# Altium PCB 密码球锁202061.PcbDoc (part 2 of 2)
Units mm, origin at the board's own origin, x right, y up, seen from the top; angles counter-clockwise.
Board outline 49.08 x 48.4 mm, 2 copper layers (Top, Bottom), stack 0.323 mm thick; 66 components, 39 nets, 195 pads, 129 vias.
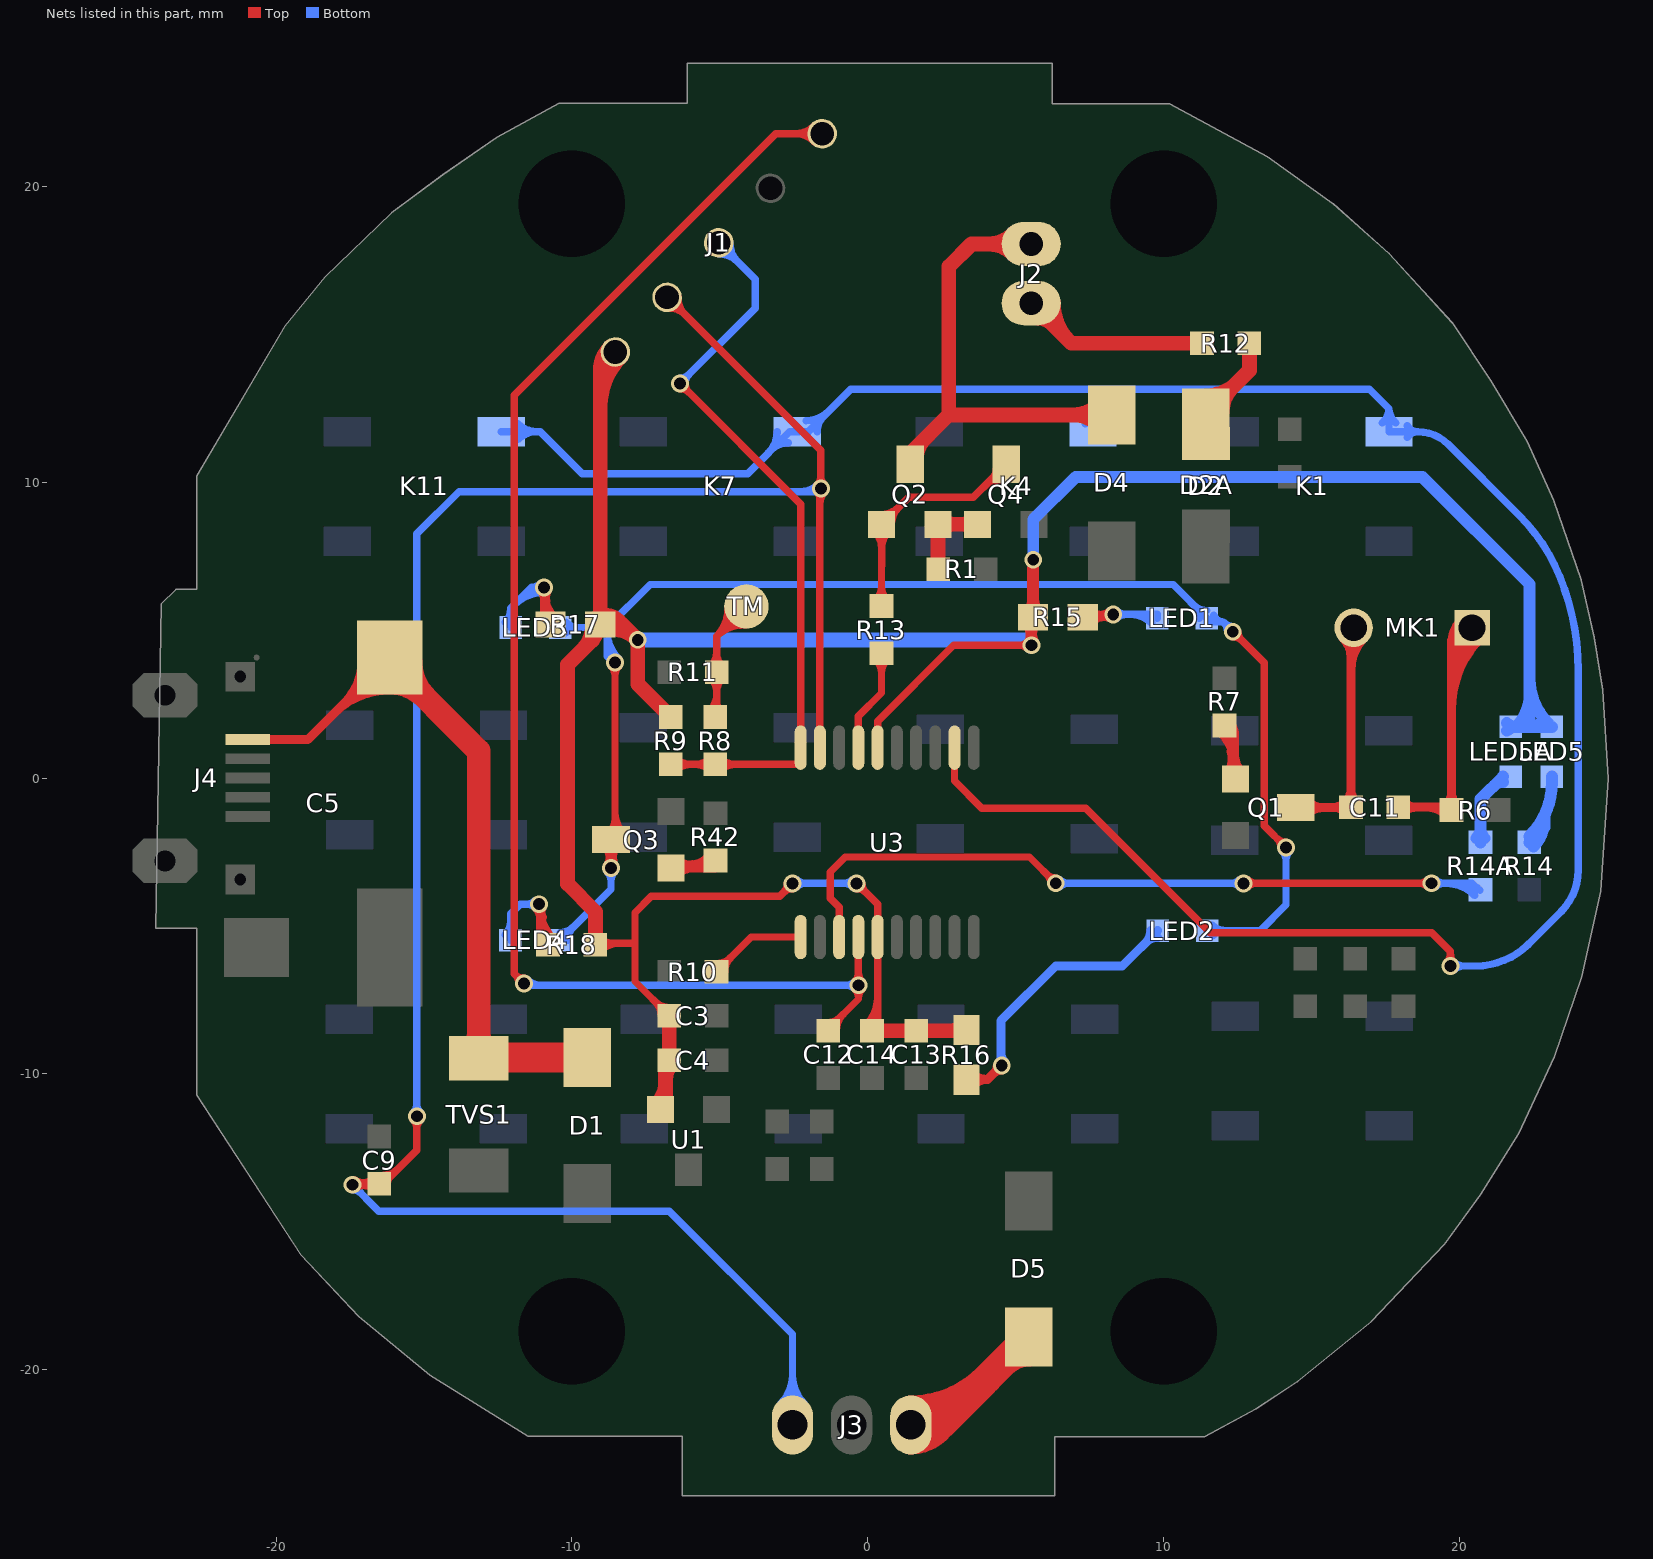
[diagram p2: the nets of this part, all layers, seen from the top]

## Via types
v1: diameter 0.6/0.6 (per signal layer), hole 0.4, Top to Bottom, 122 vias
v2: diameter 0.6, hole 0.4, Top to Bottom, tented both sides, 4 vias
v3: diameter 0.61, hole 0.406, Top to Bottom, tented both sides, 3 vias

## Nets (pads, with @x,y where several pads share a name; then routed paths per layer and width w, separated by ;. In a path a pad name is that pad's centre, name@x,y a point inside that pad or via, vN(x,y) a via of type N, cw(c..) or ccw(c..) an arc to the next point about the centre after c; other vN are vias at no path point) (continued)
KEYY_3: K1.1 K4.1 K7.1 K11.1 U3.12 | length 90.3
  Top w0.25: U3.12@2.929,1.027 2.929,-0.098 3.847,-1.016 7.366,-1.016 11.572,-5.222 19.05,-5.222 19.685,-5.857 v1(19.685,-6.35) ; v1@19.561,-6.226 ccw(c19.263,-5.928) 19.685,-5.928 ccw(c20.107,-5.928) v1@19.809,-6.226
  Bottom w0.25: K11.1@-12.39,11.704 -11.069,11.704 -9.652,10.287 -4.064,10.287 -2.647,11.704 K7.1@-2.39,11.704 -2.012,11.704 -0.577,13.139 7.663,13.139 ; K11.1@-11.825,11.439 cw(c-11.185,10.798) -11.185,11.704 cw(c-11.185,12.609) K11.1@-11.825,11.969 ; -3.361,10.99 ccw(c-4.075,11.704) K7.1@-3.065,11.704 ; -3.257,11.094 cw(c-2.69,10.528) K7.1@-2.69,11.329 ; K7.1@-2.09,12.079 ccw(c-2.09,13.173) -1.317,12.399 ; K7.1@-1.715,11.704 cw(c-0.999,11.704) -1.506,12.21 ; K4.1@7.344,11.969 ccw(c6.576,12.737) 7.663,12.737 ; 7.663,12.481 ccw(c8.387,12.481) K4.1@7.875,11.969 ; K4.1@7.884,11.827 K4.1@7.61,11.704 7.663,11.704 7.663,13.139 ; K1.1@17.376,11.997 ccw(c16.991,12.481) 17.61,12.481 ; K1.1@17.843,11.997 cw(c18.228,12.481) 17.61,12.481 ; K1.1@18.229,11.507 cw(c18.581,11.291) 18.581,11.704 ; K1.1@18.229,11.9 ccw(c18.581,12.117) 18.581,11.704 ; v1(19.685,-6.35) 20.538,-6.35 ; v1@19.809,-6.474 cw(c20.107,-6.772) 20.107,-6.35 cw(c20.107,-5.928) v1@19.809,-6.226 ; 7.663,13.139 16.952,13.139 17.61,12.481 ; 17.61,12.481 K1.1@17.61,11.704 18.581,11.704 ; 18.581,11.704 cw(c18.581,10.247) 19.61,11.277 22.001,8.887 cw(c17.551,4.437) 23.365,6.845 cw(c15.623,3.638) 24.003,3.638 24.003,-3.113 cw(c22.014,-3.113) 23.421,-4.519 22.334,-5.606 ; 20.538,-6.35 ccw(c20.538,-3.81) 22.334,-5.606 ; 20.538,-6.35 ccw(c20.538,-3.81) 22.334,-5.606
M3V3: C3.1 C4.1 C13.2 C14.2 J1.1 LED5.1 LED5A.1 R9.2 R15.1 R16.1 R17.1 R18.2 U1.2 U3.5 U3.16 | length 128.7
  Top w0.25: R18.2@-9.208,-5.638 -9.208,-5.577 -7.868,-5.577 ; R18.2@-9.014,-5.832 cw(c-8.396,-6.449) -8.396,-5.577 ; R18.2@-9.014,-5.443 ccw(c-8.692,-5.122) -8.692,-5.577 ; C3.1@-6.985,-8.032 ccw(c-7.649,-8.032) -7.179,-7.563 ccw(c-6.71,-7.093) C3.1@-6.71,-7.757 ; C3.1@-6.71,-8.032 -7.868,-6.874 -7.868,-5.577 ; v3@-2.72,-3.556 cw(c-3.154,-3.556) -2.847,-3.863 cw(c-2.54,-4.17) v3@-2.54,-3.736 ; v3(-2.54,-3.556) -2.979,-3.995 -7.314,-3.995 -7.868,-4.549 -7.868,-5.577 ; v3@-0.381,-3.736 cw(c-0.381,-4.17) -0.074,-3.863 cw(c0.233,-3.556) v3@-0.201,-3.556 ; v3(-0.381,-3.556) 0.329,-4.266 U3.5@0.329,-5.373 0.329,-8.537 C14.2@0.138,-8.537 ; C14.2@-0.056,-8.342 ccw(c-0.985,-7.413) 0.329,-7.413 ; C14.2@0.121,-8.519 ccw(c-0.382,-8.017) 0.329,-8.017 ; U3.16@0.329,1.027 0.329,1.924 2.894,4.489 v1(5.533,4.489) 5.533,5.437 R15.1@5.585,5.437 ; R15.1@5.296,5.211 cw(c4.724,4.639) v1@5.533,4.639 ; v1@5.384,4.581 ccw(c4.951,4.847) 5.442,4.979 ; v1@5.409,4.365 ccw(c5.111,4.067) 5.111,4.489 ccw(c5.111,4.912) 5.409,4.613 ccw(c5.111,4.912) 5.533,4.912 ccw(c5.956,4.912) v1@5.657,4.613 ; 5.485,4.817 ccw(c5.766,4.892) v1@5.621,4.641 ; v1@5.533,4.693 cw(c6.266,4.693) R15.1@5.748,5.211 ; 5.608,4.971 ccw(c6.047,4.853) v1@5.676,4.59
  Top w0.4: R15.1@5.413,5.61 ccw(c4.995,6.028) 5.585,6.028 ccw(c6.176,6.028) R15.1@5.758,5.61 ; R15.1@5.585,5.437 5.585,6.941 v1(5.59,7.377)
  Top w0.5: -9.659,4.325 ccw(c-10.523,5.188) R17.1@-9.301,5.188 ; -9.301,4.646 cw(c-8.924,4.646) R17.1@-9.045,5.004 ; R17.1@-9.267,5.077 cw(c-9.52,4.9) -9.301,4.682 ; R18.2@-9.208,-5.638 -9.208,-4.516 -10.146,-3.578 -10.146,3.837 -9.301,4.682 ; R17.1@-9.181,5.326 ccw(c-9.513,5.658) -9.043,5.658 ccw(c-8.574,5.658) R17.1@-8.906,5.326 ; R17.1@-9.05,5.485 cw(c-8.893,4.82) -8.41,5.303 ; -9.043,12.56 cw(c-6.695,12.56) J1.1@-8.356,14.221 ; -9.043,13.767 cw(c-7.902,13.767) J1.1@-8.709,14.574 ; R17.1@-8.935,4.999 cw(c-8.651,3.795) v1(-7.776,4.67) ; R17.1@-8.842,5.05 cw(c-8.51,4.718) -8.51,5.188 cw(c-8.51,5.658) R17.1@-8.842,5.326 ; J1.1@-8.782,14.398 cw(c-9.386,14.398) -8.959,13.971 cw(c-8.532,13.544) J1.1@-8.532,14.148 ; J1.1@-8.532,14.398 -9.043,13.887 R17.1@-9.043,5.188 ; U1.2@-7.156,-11.06 ccw(c-7.93,-10.287) -6.836,-10.287 ; U1.2@-7.01,-11.206 -6.836,-11.206 -6.836,-9.534 C4.1@-6.71,-9.534 C3.1@-6.71,-8.032 ; -6.836,-10.2 cw(c-6.044,-10.2) C4.1@-6.604,-9.64 ; R9.2@-6.659,2.063 -7.776,3.179 v1(-7.776,4.67) ; C14.2@0.138,-8.537 3.33,-8.537 R16.1@3.33,-8.519 ; 2.819,-8.537 ccw(c2.819,-8.008) R16.1@3.193,-8.382 ; -9.301,4.682 R17.1@-9.301,5.188 ; R17.1@-9.301,5.188 R17.1@-9.043,5.188 ; R17.1@-9.043,5.188 -8.294,5.188 v1(-7.776,4.67)
  Bottom w0.25: v3(-2.54,-3.556) v3(-0.381,-3.556) ; v3@-2.413,-3.683 cw(c-2.106,-3.99) -2.106,-3.556 cw(c-2.106,-3.122) v3@-2.413,-3.429 ; v3@-0.508,-3.683 ccw(c-0.815,-3.99) -0.815,-3.556 ccw(c-0.815,-3.122) v3@-0.508,-3.429
  Bottom w0.4: v1(5.59,7.377) 5.59,8.739 7.025,10.173 18.738,10.173 22.363,6.548 22.363,2.845 ; LED5A.1@21.591,1.599 cw(c21.9,1.29) LED5A.1@21.9,1.727 ; LED5A.1@21.591,1.855 ccw(c21.9,2.164) LED5A.1@21.9,1.727 ; LED5A.1@21.717,1.727 LED5A.1@21.9,1.727 ; LED5.1@22.988,1.855 cw(c24.497,3.364) 22.363,3.364 22.363,2.845 ; LED5.1@23.114,1.727 22.363,1.727 ; LED5A.1@21.9,1.727 ccw(c20.782,2.845) 22.363,2.845 ; LED5A.1@21.9,1.727 22.363,1.727 ; 22.363,1.727 22.363,2.845 ; 22.423,1.727 ccw(c22.423,2.164) 22.732,1.855 ; 22.423,1.727 ccw(c22.423,2.164) 22.732,1.855 ; 22.423,1.727 ccw(c22.423,2.164) 22.732,1.855
  Bottom w0.5: v1(-7.776,4.67) 5.356,4.67 5.539,4.486 v1(5.533,4.489) ; 4.977,4.67 cw(c4.977,3.933) v1@5.498,4.454
MT_FORWARD: R13.2 U3.17 | length 4.6
  Top w0.25: U3.17@-0.321,1.027 -0.321,2.092 0.46,2.873 R13.2@0.46,4.214 ; R13.2@0.265,4.019 cw(c-0.204,3.55) 0.46,3.55 cw(c1.124,3.55) R13.2@0.654,4.019
NetC5_4: C5.4 D1.1 J4.1 TVS1.1 | length 35.5
  Top w0.3: J4.1@-21,1.3 -18.928,1.3 C5.4@-16.155,4.072 ; -18.033,2.195 cw(c-16.155,0.317) C5.4@-16.155,2.972 ; -17.671,2.557 ccw(c-19.037,3.922) C5.4@-17.105,3.922 ; -17.521,2.707 cw(c-16.155,1.341) C5.4@-16.155,3.272 ; C5.4@-17.159,3.069 ccw(c-18.012,3.922) C5.4@-16.805,3.922 ; C5.4@-17.009,3.219 cw(c-16.155,2.365) C5.4@-16.155,3.572
  Top w0.8: C5.4@-16.155,3.222 cw(c-16.155,1.532) -14.96,2.727 cw(c-13.765,3.922) C5.4@-15.455,3.922 ; C5.4@-16.155,4.072 -16.155,3.922 -13.151,0.918 TVS1.1@-13.151,-9.463 ; TVS1.1@-13.399,-9.216 ccw(c-13.996,-8.618) -13.151,-8.618 ccw(c-12.306,-8.618) TVS1.1@-12.904,-9.216
  Top w1: TVS1.1@-13.151,-9.463 -13.151,-9.443 D1.1@-9.477,-9.443
NetC11_1: C11.1 MK1.2 Q1.3 | length 13.9
  Top w0.3: Q1.3@14.456,-0.998 16.324,-0.998 MK1.2@16.324,4.847 ; Q1.3@14.851,-1.215 cw(c15.375,-1.74) 15.375,-0.998 cw(c15.375,-0.256) Q1.3@14.851,-0.781 ; 15.683,-0.998 ccw(c15.683,-0.342) 16.147,-0.806 ccw(c15.72,-0.379) 16.324,-0.379 ccw(c16.927,-0.379) C11.1@16.5,-0.806 ; 15.757,-0.998 cw(c15.757,-1.55) C11.1@16.147,-1.159 ; MK1.2@16.061,4.726 cw(c15.428,4.093) 16.324,4.093 ; MK1.2@16.126,5.045 MK1.2@16.324,4.847 ; MK1.2@16.288,5.207 16.324,5.171 MK1.2@16.324,4.847 ; 16.324,3.652 cw(c17.843,3.652) MK1.2@16.769,4.726 ; 16.324,4.377 cw(c17.118,4.377) MK1.2@16.556,4.939
NetC11_2: C11.2 MK1.1 R6.2 | length 19.5
  Top w0.3: C11.2@17.924,-0.983 19.624,-0.983 R6.2@19.724,-1.083 19.724,4.643 MK1.1@20.161,5.08 ; C11.2@18.1,-1.159 cw(c18.527,-1.586) 18.527,-0.983 cw(c18.527,-0.379) C11.2@18.1,-0.806 ; 18.879,-0.983 cw(c18.879,-1.928) R6.2@19.547,-1.259 ; R6.2@19.547,-0.906 ccw(c19.12,-0.479) 19.724,-0.479 ccw(c20.327,-0.479) R6.2@19.9,-0.906 ; 19.724,2.325 cw(c23.17,2.325) MK1.1@20.733,4.762 ; 19.724,3.049 cw(c22.446,3.049) MK1.1@20.521,4.974 ; 19.724,3.773 cw(c21.722,3.773) MK1.1@20.309,5.186 ; 19.724,4.497 cw(c20.998,4.497) MK1.1@20.097,5.398 ; 19.724,4.643 cw(c19.986,4.381) MK1.1@20.18,4.696 ; MK1.1@19.826,4.745 ccw(c19.492,5.08) MK1.1@19.965,5.08 ; MK1.1@20.288,5.207 MK1.1@20.161,5.08 ; MK1.1@20.415,5.08 MK1.1@20.161,5.08
NetD2_2: D2.2 D2A.2 R12.2 | length 5.5
  Top w0.5: D2.2@11.421,12.172 11.818,12.172 11.818,12.697 12.892,13.771 R12.2@12.892,14.695 ; D2.2@11.421,12.922 ccw(c11.421,14.422) 12.482,13.361 ; D2.2@11.971,12.372 cw(c13.127,12.372) 12.309,13.189
NetD4_1: D4.1 J2.2 Q2.3 | length 21.3
  Top w0.5: Q2.3@1.431,10.606 1.431,10.967 2.736,12.272 ; Q2.3@1.639,10.784 cw(c2.581,10.784) 1.914,11.45 ; J2.2@4.777,18.047 J2.2@5.518,18.047 3.501,18.047 2.736,17.282 2.736,12.272 ; J2.2@4.914,17.693 ccw(c4.061,16.839) 4.061,18.047 ccw(c4.061,19.254) J2.2@4.914,18.4 ; D4.1@7.855,11.883 ccw(c6.916,10.944) 6.916,12.272 ccw(c6.916,13.599) D4.1@7.855,12.661 ; D4.1@8.244,12.272 2.736,12.272
NetD5_1: D5.1 J3.1 | length 10
  Top w1: J3.1@1.453,-22.358 ccw(c1.453,-21.126) 2.324,-21.997 ; J3.1@1.453,-21.858 2.463,-21.858 D5.1@5.433,-18.888 ; J3.1@1.453,-21.358 ccw(c1.453,-17.712) 4.031,-20.29 ; 4.58,-19.741 cw(c5.433,-20.595) D5.1@5.433,-19.388
NetJ2_1: J2.1 R12.1 | length 8.2
  Top w0.5: J2.1@5.518,16.047 6.869,14.695 R12.1@11.292,14.695 ; J2.1@5.768,15.547 cw(c5.768,14.943) 6.195,15.37 ; J2.1@6.268,16.047 ccw(c8.079,16.047) 6.798,14.766
NetLED1_1: LED1.1 R15.2 | length 6.7
  Top w0.25: R15.2@7.262,5.437 7.262,5.527 v1(8.294,5.527) ccw(c8.294,4.497) R15.2@7.555,5.215 ; R15.2@7.551,5.663 ccw(c7.879,5.991) 7.879,5.527 ; v1@8.142,5.615 cw(c7.776,5.826) 7.886,5.418 cw(c7.995,5.01) v1@8.206,5.376 ; v1@8.17,5.404 ccw(c7.871,5.105) 7.871,5.527 ccw(c7.871,5.95) v1@8.17,5.651
  Bottom w0.25: v1(8.294,5.527) 8.294,5.529 9.775,5.529 LED1.1@9.775,5.405 ; v1@8.417,5.404 cw(c8.721,5.1) 8.721,5.529 ; v1@8.417,5.651 ccw(c8.711,5.945) 8.711,5.529 ; 8.858,5.529 cw(c8.858,4.488) LED1.1@9.594,5.224
NetLED1_2: LED1.2 LED2.2 LED3.2 LED4.2 Q3.3 | length 62.8
  Top w0.25: Q3.3@-8.915,-2.311 cw(c-9.509,-2.906) v1@-8.668,-2.906 ; v1@-8.825,-2.944 ccw(c-9.202,-2.684) -8.759,-2.565 ; v1@-8.805,-2.92 ccw(c-9.134,-2.59) -8.668,-2.59 ; v1@-8.768,-2.892 ccw(c-8.915,-2.638) -8.632,-2.714 ; Q3.3@-8.737,-1.841 ccw(c-9.197,-1.381) -8.546,-1.381 ; -8.714,-2.735 ccw(c-8.464,-2.668) v1@-8.593,-2.892 ; v1(-8.681,-3.043) -8.668,-3.043 -8.668,-2.076 Q3.3@-8.68,-2.076 -8.546,-1.942 v1(-8.546,3.902) ; v1@-8.67,3.779 cw(c-8.969,3.48) -8.546,3.48 cw(c-8.124,3.48) v1@-8.423,3.779 ; v1@-8.668,-2.85 cw(c-7.905,-2.85) Q3.3@-8.445,-2.311 ; -8.668,-2.652 ccw(c-8.289,-2.652) v1@-8.557,-2.92 ; -8.584,-2.538 ccw(c-8.052,-2.68) v1@-8.529,-2.956 ; -8.546,-1.167 ccw(c-7.593,-1.167) Q3.3@-8.267,-1.841 ; v1(12.328,4.944) 12.731,4.56 13.394,3.898 13.394,-1.61 v1(14.13,-2.346) ; v1@12.332,4.769 cw(c12.343,4.346) 12.634,4.652 cw(c12.925,4.958) v1@12.503,4.948 ; v1@13.955,-2.346 ccw(c13.533,-2.346) 13.831,-2.048 ccw(c14.13,-1.748) v1@14.13,-2.171
  Bottom w0.25: LED4.2@-10.4,-5.475 -8.681,-3.756 v1(-8.681,-3.043) ; LED4.2@-10.4,-5.219 ccw(c-10.4,-4.601) -9.963,-5.038 ccw(c-9.526,-5.475) LED4.2@-10.144,-5.475 ; LED3.2@-10.395,5.088 -9.474,5.088 -9.471,5.091 -8.806,5.091 ; LED3.2@-10.214,4.907 cw(c-9.777,4.47) -9.777,5.088 cw(c-9.777,5.706) LED3.2@-10.214,5.269 ; -8.806,4.349 ccw(c-8.1,4.349) v1@-8.599,3.849 ; -8.806,4.953 ccw(c-7.496,4.953) v1@-8.423,4.026 ; v1@-8.805,-3.167 cw(c-9.103,-3.466) -8.681,-3.466 cw(c-8.258,-3.466) v1@-8.557,-3.167 ; v1(-8.546,3.902) -8.59,3.904 -8.806,4.12 -8.806,5.091 ; LED1.2@11.196,5.405 ccw(c10.577,5.405) 11.015,5.842 ccw(c11.452,6.279) LED1.2@11.452,5.661 ; LED2.2@11.466,-5.155 13.26,-5.155 14.13,-4.285 v1(14.13,-2.346) ; LED2.2@11.647,-5.336 cw(c12.084,-5.773) 12.084,-5.155 cw(c12.084,-4.537) LED2.2@11.647,-4.974 ; LED1.2@11.69,5.498 ccw(c12.017,5.625) 12.017,5.275 ; 12.063,5.229 ccw(c12.328,5.494) v1@12.328,5.119 ; v1@12.153,4.944 ccw(c11.687,4.945) 12.017,5.275 ; v1(12.328,4.944) 12.338,4.953 12.017,5.275 ; v1@14.006,-2.47 cw(c13.707,-2.769) 14.13,-2.769 cw(c14.552,-2.769) v1@14.254,-2.47 ; -8.806,5.091 -7.357,6.54 10.317,6.54 LED1.2@11.452,5.405 11.46,5.405 11.591,5.275 12.017,5.275
NetLED2_1: LED2.1 R16.2 | length 12.4
  Top w0.25: R16.2@3.33,-10.196 R16.2@3.33,-10.182
  Top w0.3: R16.2@3.33,-10.182 4.051,-10.182 ; R16.2@3.539,-9.987 ccw(c4.007,-9.519) 4.007,-10.182 ; R16.2@3.544,-10.399 cw(c4.051,-10.883) 4.051,-10.182 ; v1@4.373,-9.71 cw(c4.011,-9.71) 4.267,-9.966 cw(c4.523,-10.222) v1@4.523,-9.86 ; v1(4.523,-9.71) 4.051,-10.182
  Bottom w0.3: v1@4.494,-9.71 4.494,-8.206 6.35,-6.35 8.595,-6.35 LED2.1@9.789,-5.155 ; 4.494,-9.278 ccw(c4.955,-9.278) v1@4.629,-9.604 ; LED2.1@9.558,-5.155 cw(c9.001,-5.155) 9.395,-5.55 cw(c9.789,-5.944) LED2.1@9.789,-5.386
NetLED3_1: LED3.1 R17.2 | length 9.9
  Top w0.25: v1@-11.071,6.317 cw(c-11.369,6.019) -10.947,6.019 cw(c-10.524,6.019) v1@-10.823,6.317 ; v1@-11.034,6.29 cw(c-11.207,5.99) -10.873,6.08 ; -10.947,5.751 ccw(c-10.221,5.751) R17.2@-10.734,5.237 ; v1@-10.947,6.354 ccw(c-9.617,6.354) R17.2@-10.557,5.414 ; v1(-10.947,6.441) -10.947,5.188 R17.2@-10.72,5.188 ; -10.845,5.975 cw(c-10.363,6.104) v1@-10.795,6.354
  Bottom w0.25: LED3.1@-12.253,5.269 ccw(c-12.69,5.706) -12.072,5.706 ccw(c-11.453,5.706) LED3.1@-11.891,5.269 ; LED3.1@-12.072,5.088 -12.072,5.732 -11.362,6.441 ; -11.955,5.849 cw(c-10.947,4.841) v1@-10.947,6.266 ; -11.528,6.275 cw(c-10.947,5.694) v1@-10.947,6.516 ; v1@-11.072,6.319 ccw(c-11.362,6.036) -11.362,6.441 ; v1@-11.072,6.563 cw(c-11.362,6.847) -11.362,6.441 ; v1(-10.947,6.441) -11.362,6.441
NetLED4_1: LED4.1 R18.1 | length 8.7
  Top w0.25: v1@-11.241,-4.384 cw(c-11.621,-4.765) -11.083,-4.765 ; v1@-11.204,-4.412 cw(c-11.449,-4.837) -10.976,-4.71 ; v1(-11.117,-4.261) -11.083,-4.261 -11.083,-5.638 R18.1@-10.808,-5.638 ; -11.083,-4.914 ccw(c-10.084,-4.914) R18.1@-10.79,-5.62 ; -11.083,-4.602 cw(c-10.776,-4.602) v1@-10.993,-4.384 ; v1@-11.083,-4.31 ccw(c-9.48,-4.31) R18.1@-10.614,-5.443 ; -11.001,-4.617 cw(c-10.658,-4.526) v1@-10.965,-4.348
  Bottom w0.25: LED4.1@-12.258,-5.294 ccw(c-12.695,-4.857) -12.077,-4.857 ccw(c-11.459,-4.857) LED4.1@-11.896,-5.294 ; LED4.1@-12.077,-5.475 -12.077,-4.592 -11.746,-4.261 v1(-11.117,-4.261) ; v1@-11.241,-4.384 ccw(c-11.539,-4.683) -11.539,-4.261 ccw(c-11.539,-3.838) v1@-11.241,-4.137
NetLED5_2: LED5.2 R14.2 | length 5.1
  Bottom w0.4: R14.2@22.348,-2.174 22.86,-1.662 22.86,-1.263 ; R14.2@22.489,-2.316 ccw(c21.594,-1.421) 22.86,-1.421 ; R14.2@22.548,-2.174 cw(c23.031,-2.174) 22.689,-1.833 cw(c22.348,-1.492) 22.348,-1.974 22.37,-1.952 ccw(c20.574,-0.156) 22.86,-1.263 ; LED5.2@23.114,0.051 23.114,-0.156 cw(c20.574,-0.156) 22.86,-1.263
NetLED5A_2: LED5A.2 R14A.1 | length 3.6
  Bottom w0.4: R14A.1@20.56,-2.033 ccw(c20.218,-1.691) 20.701,-1.691 ccw(c21.184,-1.691) R14A.1@20.842,-2.033 ; R14A.1@20.701,-2.174 20.701,-0.711 LED5A.2@21.463,0.051 ; 21.154,-0.258 cw(c21.463,-0.567) LED5A.2@21.463,-0.13
NetQ1_1: Q1.1 R7.1 | length 7.6
  Top w0.25: R7.1@11.858,1.583 cw(c10.493,0.218) Q1.1@12.424,0.218 ; R7.1@12.035,1.76 cw(c11.097,0.822) 12.424,0.822 ; R7.1@12.053,1.778 12.424,1.407 Q1.1@12.424,-0.033 ; Q1.1@12.138,0.137 ccw(c11.265,0.654) 12.248,0.905 ; Q1.1@12.189,0.202 ccw(c11.622,0.769) 12.424,0.769 ccw(c13.226,0.769) Q1.1@12.659,0.202 ; R7.1@12.212,1.937 cw(c11.7,1.425) R7.1@12.424,1.425 ; 12.322,0.614 ccw(c12.894,0.761) Q1.1@12.593,0.253
NetQ2_1: Q2.1 Q4.3 R13.1 | length 13.1
  Top w0.25: Q2.1@0.231,8.339 cw(c-0.336,7.772) 0.466,7.772 cw(c1.268,7.772) Q2.1@0.701,8.339 ; R13.1@0.265,6.008 ccw(c-0.204,6.478) 0.46,6.478 ccw(c1.124,6.478) R13.1@0.654,6.008 ; R13.1@0.46,5.814 0.46,7.162 0.466,7.169 Q2.1@0.466,8.574 1.385,9.493 3.562,9.493 Q4.3@4.675,10.606 ; Q2.1@0.466,8.906 ccw(c0.466,9.708) 1.033,9.141 ccw(c1.6,8.574) Q2.1@0.798,8.574 ; 3.805,9.736 cw(c4.675,8.865) Q4.3@4.675,10.096 ; Q4.3@4.232,10.162 cw(c4.675,9.719) Q4.3@4.675,10.346 ; Q4.3@4.234,10.165 ccw(c3.97,10.428) Q4.3@4.343,10.428
NetQ2_2: Q2.2 Q4.1 R1.1 | length 5.2
  Top w0.5: Q2.2@2.225,8.428 cw(c1.87,8.073) 2.371,8.073 ; Q2.2@2.371,8.574 Q4.1@3.71,8.574 ; 2.371,8.075 cw(c2.87,8.075) 2.518,8.428 cw(c2.871,8.074) 2.871,8.574 cw(c2.871,9.074) Q2.2@2.518,8.721 ; Q2.2@2.371,8.574 2.371,7.059 R1.1@2.379,7.059 ; Q4.1@3.564,8.428 ccw(c3.21,8.074) 3.21,8.574 ccw(c3.21,9.074) Q4.1@3.564,8.721
NetQ3_1: Q3.1 R42.2 | length 6.3
  Top w0.25: Q3.1@-6.648,-3.041 -6.648,-3.063 -5.151,-3.063 R42.2@-5.151,-2.788 ; Q3.1@-6.479,-3.063 ccw(c-6.479,-1.461) R42.2@-5.346,-2.594 ; Q3.1@-6.462,-2.765 ccw(c-6.001,-2.079) -5.787,-2.878 ; Q3.1@-6.413,-3.276 cw(c-5.9,-3.789) -5.9,-3.063 ; Q3.1@-6.413,-2.806 ccw(c-5.792,-2.185) -5.792,-3.063 ; Q3.1@-6.36,-3.207 cw(c-5.859,-3.497) -6.008,-2.937 ; -5.875,-3.063 ccw(c-5.875,-2.064) R42.2@-5.169,-2.771
NetR8_1: R8.1 R11.2 TM.1 | length 11.2
  Top w0.25: R8.1@-5.353,2.257 ccw(c-5.949,2.853) -5.106,2.853 ; R11.2@-5.305,3.377 cw(c-5.787,2.895) -5.106,2.895 ; R11.2@-5.305,3.766 ccw(c-5.775,4.235) -5.111,4.235 ccw(c-4.447,4.235) R11.2@-4.916,3.766 ; R8.1@-5.158,2.063 -5.106,2.063 -5.106,3.571 R11.2@-5.111,3.571 -5.111,4.792 ; -5.106,2.6 ccw(c-4.621,2.6) R8.1@-4.964,2.257 ; -5.106,2.919 cw(c-4.459,2.919) R11.2@-4.916,3.377 ; TM.1@-4.728,5.773 cw(c-6.038,5.719) -5.111,4.792 ; TM.1@-4.478,5.783 cw(c-5.264,5.751) -4.708,5.195 cw(c-4.152,4.638) TM.1@-4.119,5.424 ; TM.1@-4.227,5.491 -4.103,5.614 TM.1@-4.103,5.799 -5.111,4.792 ; TM.1@-4.129,5.175 ccw(c-4.184,3.865) -5.111,4.792
NetR10_2: R10.2 U3.1 | length 4.4
  Top w0.25: R10.2@-5.114,-6.546 -3.941,-5.373 U3.1@-2.271,-5.373 ; R10.2@-5.114,-6.271 ccw(c-5.114,-5.607) -4.645,-6.076 ccw(c-4.176,-6.546) R10.2@-4.839,-6.546
NRST: C12.2 J1.5 U3.4 | length 57
  Top w0.25: v1@-11.792,-6.944 ccw(c-12.214,-6.944) -11.916,-6.646 ccw(c-11.617,-6.347) v1@-11.617,-6.769 ; v1(-11.617,-6.944) -11.953,-6.608 -11.953,12.939 -3.119,21.773 J1.5@-1.545,21.773 ; J1.5@-1.81,21.508 ccw(c-2.45,20.868) -2.45,21.773 ccw(c-2.45,22.679) J1.5@-1.81,22.038 ; C12.2@-1.339,-8.537 -1.364,-8.537 -1.364,-8.512 -0.317,-7.465 v1(-0.317,-7) ; C12.2@-1.339,-8.262 ccw(c-1.339,-7.719) -0.955,-8.103 ; C12.2@-1.064,-8.537 cw(c-0.279,-8.537) -0.834,-7.982 ; v1@-0.441,-7.123 cw(c-0.739,-7.422) -0.317,-7.422 cw(c0.105,-7.422) v1@-0.193,-7.123 ; v1@-0.441,-6.876 ccw(c-0.741,-6.579) -0.319,-6.577 ccw(c0.104,-6.576) -0.194,-6.875 cw(c0.116,-6.567) -0.321,-6.567 ; v1@-0.441,-6.876 ccw(c-0.729,-6.588) -0.321,-6.588 ; v1(-0.317,-7) -0.321,-7 U3.4@-0.321,-5.373 -0.321,-5.923 v1(-0.317,-7)
  Bottom w0.25: v1(-11.617,-6.944) -11.637,-6.944 -11.582,-7 v1(-0.317,-7) ; v1@-11.493,-6.821 ccw(c-11.061,-6.388) -11.061,-7 ; v1@-0.441,-7.123 ccw(c-0.739,-7.422) -0.739,-7 ccw(c-0.739,-6.577) v1@-0.441,-6.876
RREEN: R14A.2 U3.3 | length 30.6
  Top w0.25: U3.3@-0.971,-5.373 -0.971,-4.363 -1.27,-4.064 -1.27,-3.175 -0.762,-2.667 5.461,-2.667 v2(6.35,-3.556) ; v2@6.175,-3.556 ccw(c5.753,-3.556) 6.051,-3.257 ccw(c6.35,-2.959) v2@6.35,-3.381 ; v3(12.7,-3.556) v2(19.05,-3.556) ; v3@12.827,-3.683 cw(c13.134,-3.99) 13.134,-3.556 cw(c13.134,-3.122) v3@12.827,-3.429 ; v2@18.926,-3.68 ccw(c18.628,-3.978) 18.628,-3.556 ccw(c18.628,-3.134) v2@18.926,-3.432
  Bottom w0.25: v2(6.35,-3.556) v3(12.7,-3.556) ; v2@6.474,-3.68 cw(c6.772,-3.978) 6.772,-3.556 cw(c6.772,-3.134) v2@6.474,-3.432 ; v3@12.573,-3.683 ccw(c12.266,-3.99) 12.266,-3.556 ccw(c12.266,-3.122) v3@12.573,-3.429 ; v2(19.05,-3.556) 20.411,-3.556 R14A.2@20.629,-3.774 ; v2@19.174,-3.68 cw(c19.472,-3.978) 19.472,-3.556 cw(c19.472,-3.134) v2@19.174,-3.432 ; 19.511,-3.556 cw(c19.511,-4.964) R14A.2@20.507,-3.968 ; 20.114,-3.556 cw(c20.114,-4.361) R14A.2@20.683,-3.792
SWCLK/TM: J1.3 R8.2 R9.1 U3.20 | length 31.3
  Top w0.25: R9.1@-6.659,0.463 R8.2@-5.158,0.463 -2.271,0.463 U3.20@-2.271,1.027 -2.271,9.256 v2(-6.35,13.335) ; R9.1@-6.465,0.268 cw(c-5.995,-0.201) -5.995,0.463 cw(c-5.995,1.127) R9.1@-6.465,0.657 ; v2@-6.35,13.16 cw(c-6.35,12.738) -6.051,13.036 cw(c-5.753,13.335) v2@-6.175,13.335 ; R8.2@-5.353,0.268 ccw(c-5.822,-0.201) -5.822,0.463 ccw(c-5.822,1.127) R8.2@-5.353,0.657 ; R8.2@-4.964,0.268 cw(c-4.494,-0.201) -4.494,0.463 cw(c-4.494,1.127) R8.2@-4.964,0.657 ; -2.488,0.463 ccw(c-2.488,0.694) U3.20@-2.324,0.53
  Bottom w0.25: v2(-6.35,13.335) -3.81,15.875 -3.81,16.857 J1.3@-5.039,18.085 ; v2@-6.35,13.51 ccw(c-6.35,13.932) -6.051,13.634 ccw(c-5.753,13.335) v2@-6.175,13.335 ; J1.3@-5.039,17.71 cw(c-5.039,16.805) -4.398,17.445 cw(c-3.758,18.085) J1.3@-4.664,18.085
SWDIO/INIT_KEY: C9.1 J1.2 J3.3 U3.19 | length 90.8
  Top w0.25: v1@-17.322,-13.594 ccw(c-17.058,-13.183) -16.931,-13.655 ; v1@-17.318,-13.596 ccw(c-17.06,-13.217) -16.941,-13.66 ; v1@-17.243,-13.741 ccw(c-17.243,-12.987) -16.71,-13.52 cw(c-17.224,-13.006) v1@-17.224,-13.733 ; v1@-17.134,-13.733 cw(c-17.134,-14.333) -16.71,-13.909 ccw(c-17.115,-14.315) -17.115,-13.741 ; -17.102,-13.703 ccw(c-17.032,-13.963) -17.265,-13.828 cw(c-17.025,-13.967) -17.096,-13.699 ; -17.012,-13.733 cw(c-17.012,-13.337) -17.293,-13.617 ccw(c-16.994,-13.318) -16.994,-13.741 ccw(c-16.994,-14.163) v1@-17.293,-13.865 ; -16.976,-13.733 ccw(c-16.976,-14.182) v1@-17.293,-13.865 ; -16.969,-13.778 ccw(c-17.055,-14.102) v1@-17.293,-13.865 ; C9.1@-16.515,-13.715 -16.515,-13.733 -17.417,-13.733 v1(-17.417,-13.741) -16.408,-13.741 -15.24,-12.573 v2(-15.24,-11.43) ; C9.1@-16.515,-13.44 ccw(c-16.515,-12.453) -15.818,-13.151 ; C9.1@-16.24,-13.715 cw(c-15.899,-13.715) C9.1@-16.14,-13.473 ; v2@-15.364,-11.554 cw(c-15.662,-11.852) -15.24,-11.852 cw(c-14.818,-11.852) v2@-15.116,-11.554 ; J1.2@-6.785,16.242 -6.187,15.674 ; J1.2@-6.75,15.868 cw(c-6.682,15.152) -6.187,15.674 ; J1.2@-6.411,16.226 ccw(c-5.691,16.197) -6.187,15.674 ; v1@-1.712,9.661 cw(c-1.93,9.442) -1.621,9.442 ; v1@-1.712,9.908 ccw(c-2.01,10.207) -1.588,10.207 ccw(c-1.166,10.207) v1@-1.464,9.908 ; U3.19@-1.621,1.027 -1.621,9.771 -1.598,9.794 v1(-1.588,9.784) -1.588,11.076 -6.187,15.674 ; -1.621,9.281 cw(c-1.085,9.281) v1@-1.464,9.661
  Bottom w0.25: v1@-17.417,-13.916 cw(c-17.417,-14.338) -17.118,-14.04 cw(c-16.819,-13.741) v1@-17.242,-13.741 ; v1(-17.417,-13.741) -16.525,-14.632 -6.709,-14.632 -2.547,-18.794 J3.3@-2.547,-21.858 ; v2@-15.364,-11.306 ccw(c-15.662,-11.008) -15.24,-11.008 ccw(c-14.818,-11.008) v2@-15.116,-11.306 ; v2(-15.24,-11.43) -15.24,8.255 -13.817,9.678 -1.588,9.678 v1(-1.588,9.784) ; J3.3@-2.954,-21.151 ccw(c-3.936,-20.17) -2.547,-20.17 ccw(c-1.159,-20.17) J3.3@-2.141,-21.151 ; J3.3@-2.777,-21.328 ccw(c-3.332,-20.773) -2.547,-20.773 ccw(c-1.763,-20.773) J3.3@-2.318,-21.328 ; -2.266,9.678 ccw(c-2.266,10.463) v1@-1.712,9.908
pads on no net: C5.3 J4.2 J4.3 J4.4 J4.6 J4.7 J4.8 J4.9 K1.2 K1.4 K2.2 K2.4 K3.2 K3.4 K4.2 K4.4 K5.2 K5.4 K6.2 K6.4 K7.2 K7.4 K8.2 K8.4 K9.2 K9.4 K11.2 K11.4 K12.1 K12.3 K13.2 K13.3

## Polygon pours and split planes (outlines as drawn)
GND on Top "Top Layer-No Net" (hatched 45Degree grid 0.279 track 0.381, remove dead copper, pour order 3): -27.305,27.94 26.543,27.94 26.797,27.686 26.797,-29.845 -30.861,-29.845 -30.861,27.94
GND on Bottom "Top Layer-No Net" (hatched 45Degree grid 0.279 track 0.381, remove dead copper, pour order 4): -27.305,27.94 26.543,27.94 26.797,27.686 26.797,-29.845 -30.861,-29.845 -30.861,27.94

## Keep-outs
Keep-Out Layer:
  circle w0.1: c0,-17.8 r1.545
  circle w0.1: c0,18.4 r1.42
  circle w0.1: c10,19.4 r1.796
  circle w0.1: c-10,19.4 r1.796
  circle w0.1: c-10,-18.7 r1.796
  circle w0.1: c10,-18.7 r1.778
  pour cut-out: 10,22.6 ccw(c10,19.4) 6.8,19.4 ccw(c10,19.4) 10,16.2 ccw(c10,19.4) 13.2,19.4 ccw(c10,19.4)
  pour cut-out: -10,22.6 ccw(c-10,19.4) -13.2,19.4 ccw(c-10,19.4) -10,16.2 ccw(c-10,19.4) -6.8,19.4 ccw(c-10,19.4)
  pour cut-out: 10,-15.5 ccw(c10,-18.7) 6.8,-18.7 ccw(c10,-18.7) 10,-21.9 ccw(c10,-18.7) 13.2,-18.7 ccw(c10,-18.7)
  pour cut-out: -10,-15.5 ccw(c-10,-18.7) -13.2,-18.7 ccw(c-10,-18.7) -10,-21.9 ccw(c-10,-18.7) -6.8,-18.7 ccw(c-10,-18.7)
  lines w0.15: -23.659,4 ccw(c-23.659,5) -22.659,5 ; -23.622,4 -24.2,4 ccw(c-24.2,3) -25.2,3 -25.2,-3 ccw(c-24.2,-3) -24.2,-4 -23.659,-4 cw(c-23.659,-5) -22.659,-5 ; -22.66,-5 -22.659,-10.566 ; -22.659,4.963 -22.659,10.566 ; -22.658,10.566 cw(c0,0) -10.109,22.865 -6.3,22.865 -6.3,24.2 6.3,24.2 6.3,22.854 10.134,22.854 cw(c0,0) 11.532,-22.181 ; -22.656,-10.569 ccw(c0,0) -11.532,-22.181 ; -11.532,-22.18 -6.3,-22.18 -6.3,-24.18 6.3,-24.18 6.3,-22.18 11.532,-22.18 ; 13.147,-21.25 14.547,-20.33 ; 19.507,-15.69 20.717,-14.03 ; 23.217,-9.37 24.147,-6.65

## Other copper
Top:
  region net GND: -20.073,-1.925 -20.073,-1.3 -20.898,-1.3 -20.898,-1.925
  region net GND: -11.43,-14.914 -11.43,-11.787 -14.557,-11.787 -14.557,-14.914
  region net GND: -14.231,-8.192 -14.231,-2.413 -18.034,-2.413 -18.034,-8.192
  region net GND: -18.724,-7.62 -18.724,-4.283 -22.028,-4.283 -22.028,-7.62
  region net GND: 19.074,-9.017 19.074,-7.239 15.627,-7.239 15.627,-9.017
  region net GND: -0.323,-12.192 -0.323,-11.213 -4.064,-11.213 -4.064,-12.192
  region net GND: 2.458,-11.811 2.458,-9.652 -2.032,-9.652 -2.032,-11.811
  region net GND: -3.632,-12.108 -3.632,-7.62 -5.588,-7.62 -5.588,-12.108
  region net GND: -15.494,-1.143 -14.231,-2.413 -15.621,-5.334 -17.018,-5.334 -21.209,-1.143
  region net NetC5_4: -20.828,1.143 -14.097,1.143 -13.843,1.397 -13.843,5.08 -14.478,5.715 -18.415,5.715 -19.05,5.08 -19.05,3.429 -21.209,1.27

## Silkscreen, mask and mechanical layers (free items; w line width, h text height)
Silkscreen Top:
  circle w0.1: c-22.642,-0.762 r0.6
  circle w0.1: c-17.702,-0.762 r0.6
  text "NRST" at -0.127,21.717 h0.66
  text "GND" at -2.667,17.78 h0.66 r270
  text "SWCLK/TM" at -4.452,16.082 h0.66 r270
  text "SWDIO/INIT_KEY" at -6.223,14.351 h0.66 r270
  text "M3V3" at -9.525,13.335 h0.5 r270
  text "GND" at -2.201,-18.351 h0.66 r90
  text "BAT+" at 3.398,-18.751 h0.66 r90
  text "SWDIO/INIT_KEY" at -3.882,-18.804 h0.66 r90
Silkscreen Bottom:
  text "YL-99" at 2.092,15.028 h0.76
  text "JYDQS_202061_V1.0" at -2.921,14.859 h0.76